# Altium PCB mchf_pro_ui.PcbDoc (part 1 of 7)
Units mil, origin at the board's own origin, x right, y up, seen from the top; angles counter-clockwise.
Board outline 7877.73 x 5661.04 mil, 2 copper layers (Top Layer, Bottom Layer); 345 components, 345 nets, 1318 pads, 783 vias.
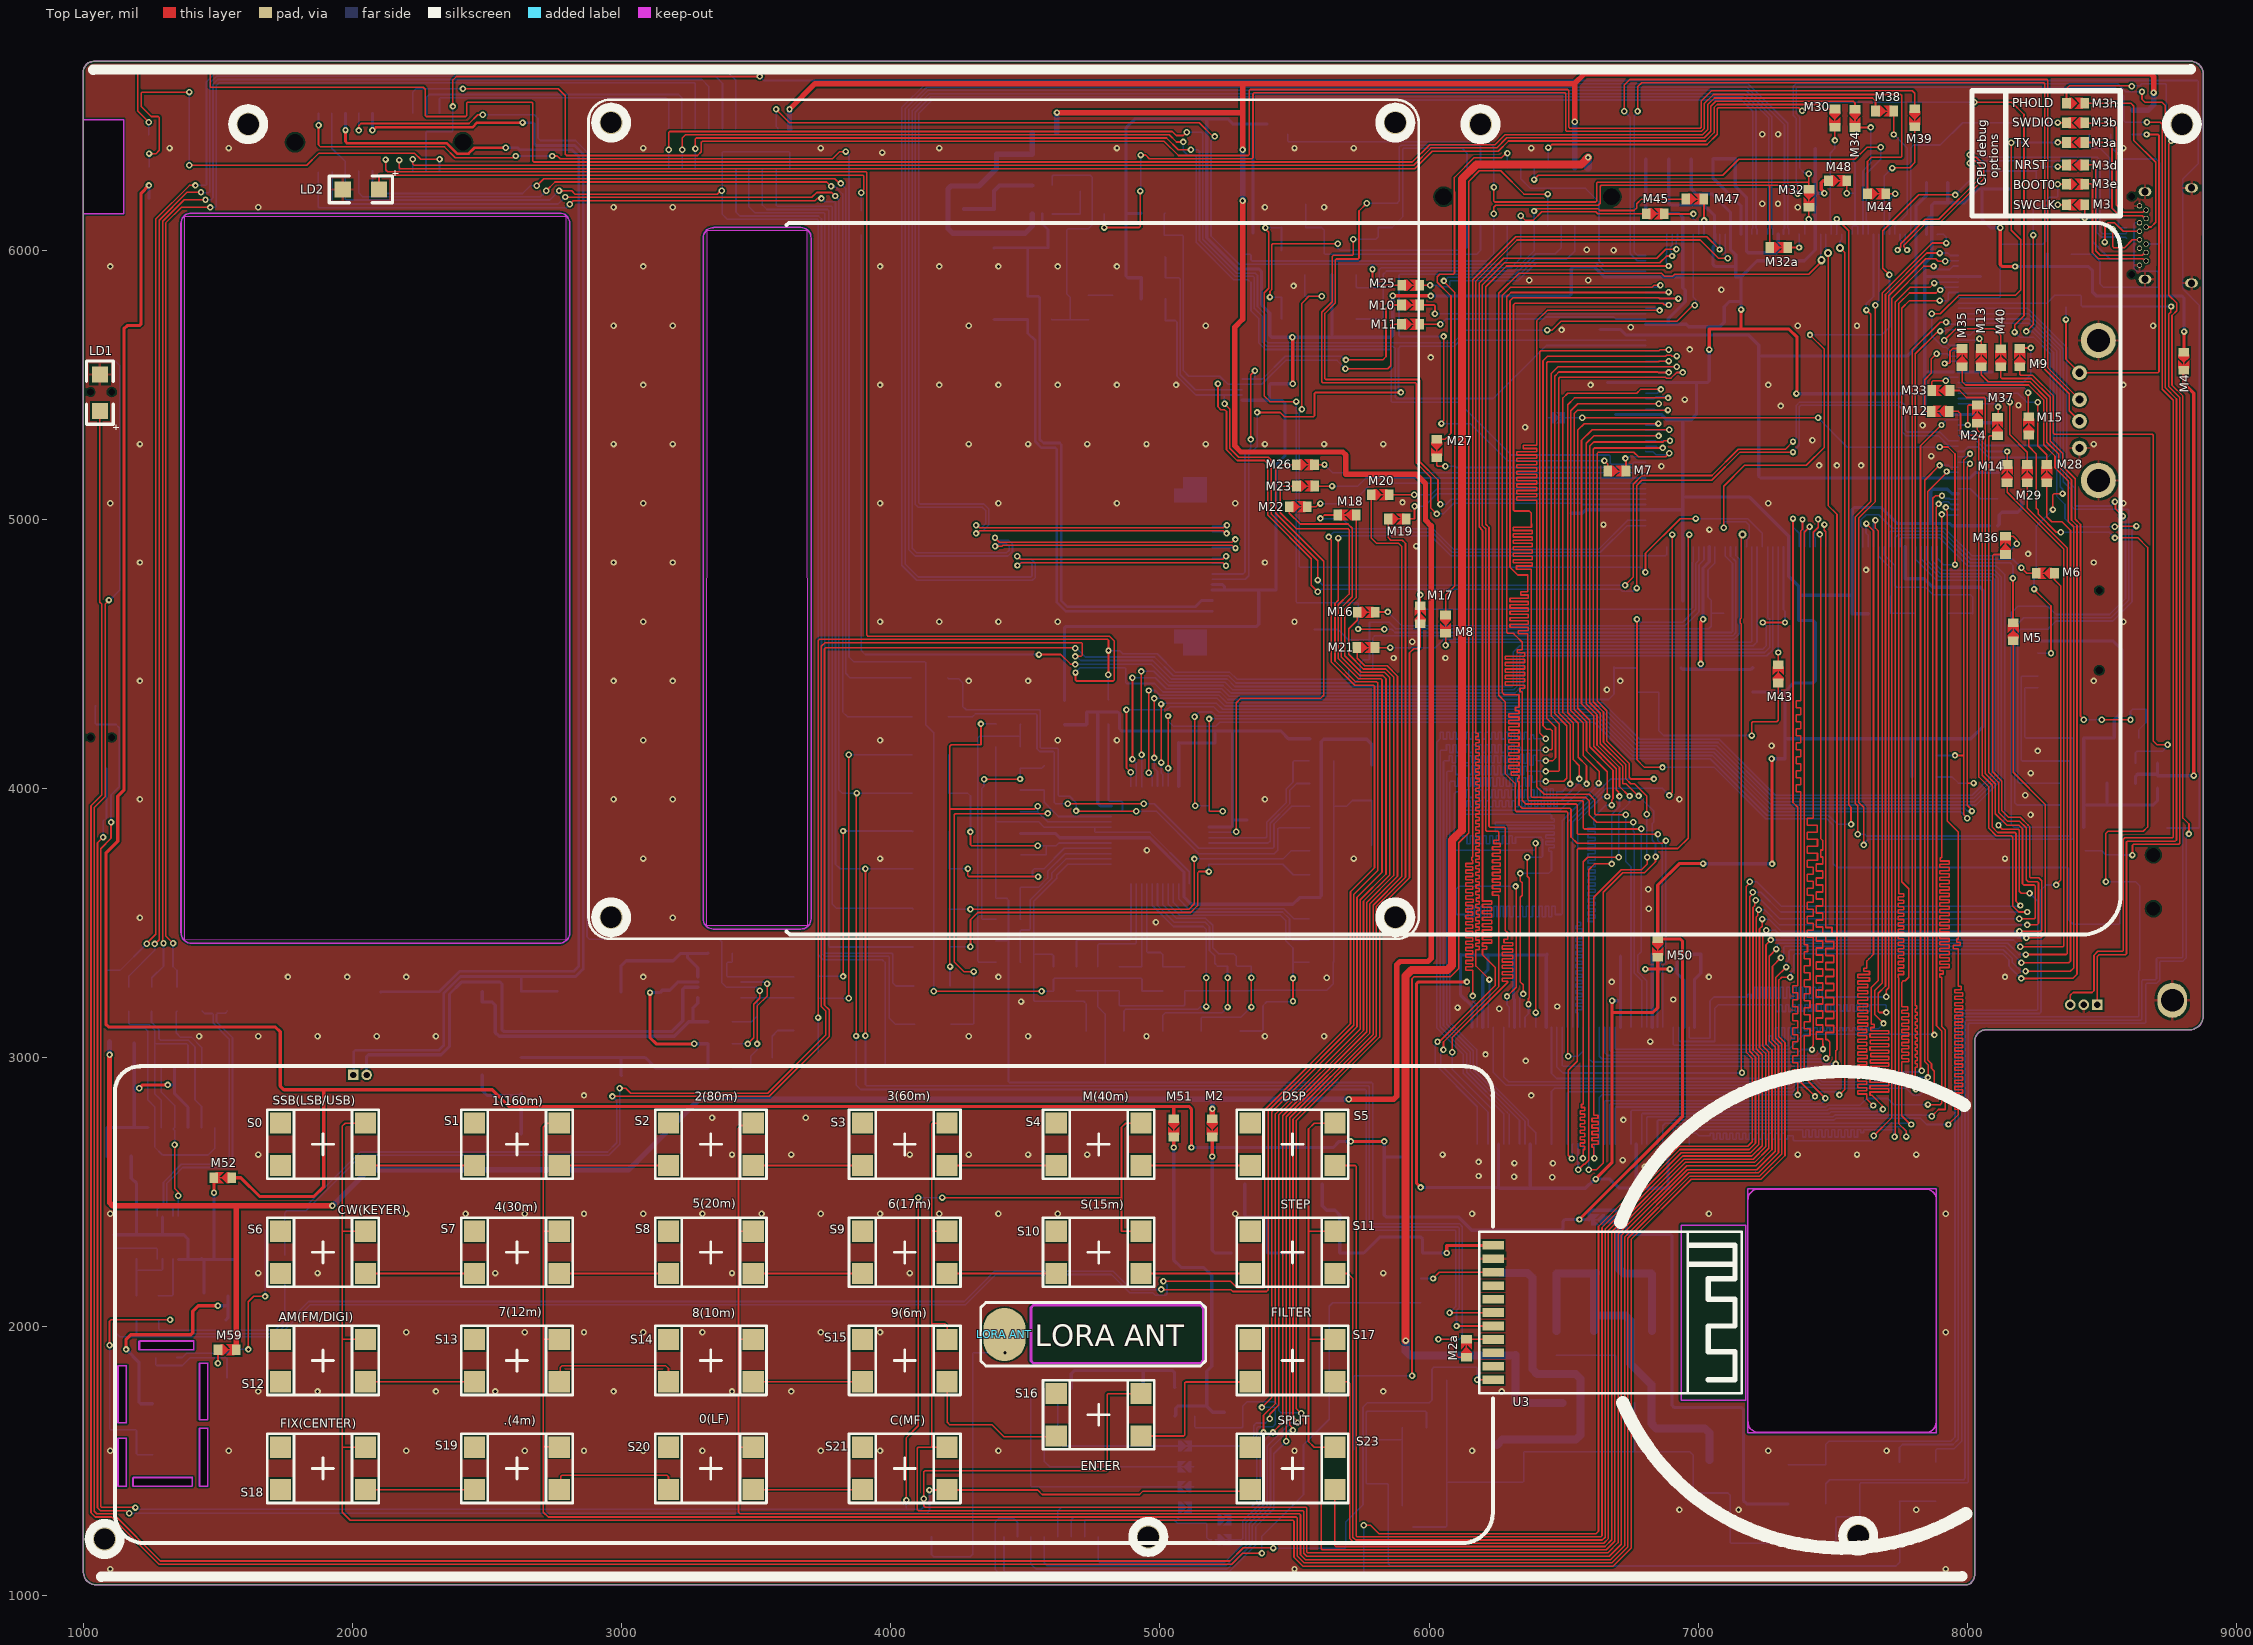
[diagram p0: Top Layer view]
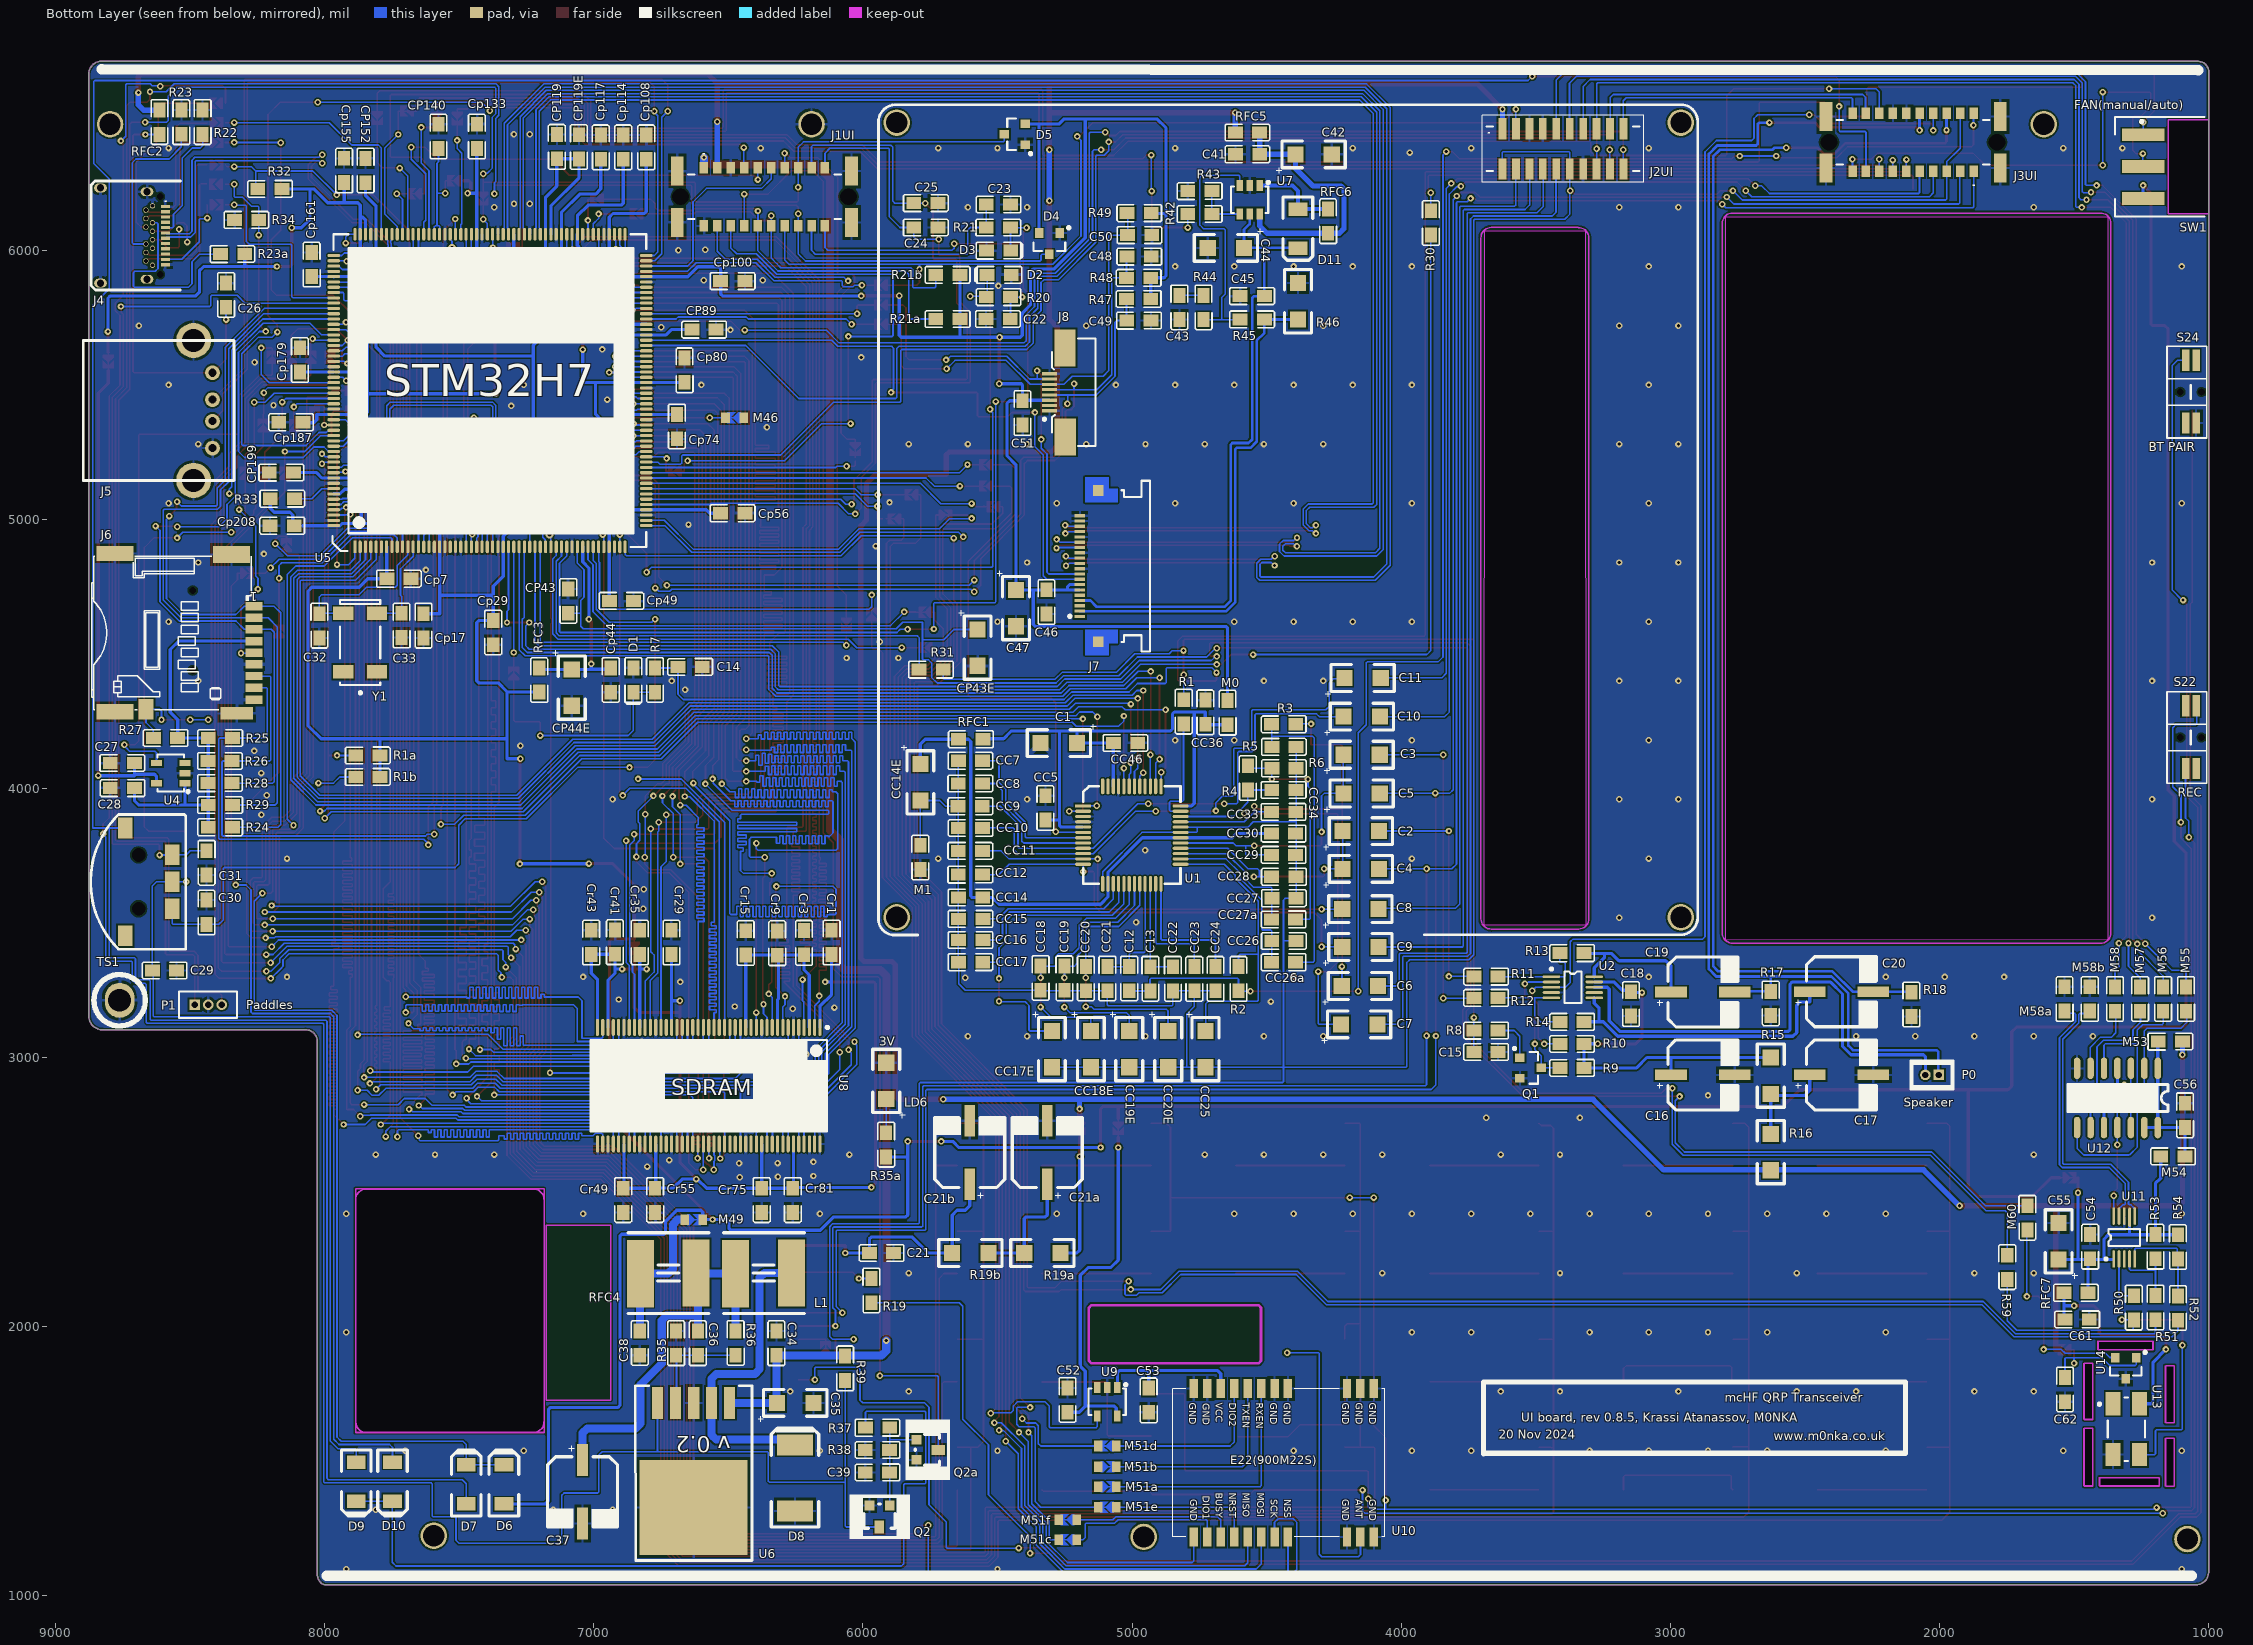
[diagram p1: Bottom Layer view, seen from below]

## Layer stack, top to bottom
Top Solder: solder mask 0.4, Solder Resist, Dk 3.5
Top Layer: signal copper 1.4
Dielectric 1: dielectric 12.6, FR-4, Dk 4.8
Bottom Layer: signal copper 1.4
Bottom Solder: solder mask 0.4, Solder Resist, Dk 3.5

## Board outline
1047.73,1041.39 cw(c1047.54,1088.93) 1000,1088.93 999.58,5699.29 999.49,6661.89 999.49,6662.44 cw(c1038.71,6662.76) 1038.39,6701.98 8828.29,6701.98 8828.11,6702.43 cw(c8828.3,6653.51) 8877.22,6653.91 8877.01,6653.11 8876.34,3156.5 cw(c8824.85,3155.22) 8826.12,3103.72 8825.65,3103.46 8070.87,3103.46 ccw(c8070.02,3061.02) 8027.58,3061.87 8027.56,3061.87 8027.56,1076.79 8027.17,1076.79 cw(c7988.18,1078.6) 7999.97,1041.39 7999.98,1041.39
cut-out: 2794.41,3439.04 2794.41,6124.72 1375.63,6124.72 1374.02,3440.98
cut-out: 1129.44,1408.64 1161.54,1408.64 1161.54,1586.16 1129.44,1586.16
cut-out: 1129.44,1644.15 1161.54,1644.15 1161.54,1856.06 1129.44,1856.06
cut-out: 1463.83,1623.5 1431.73,1623.5 1431.73,1409.07 1463.83,1409.07
cut-out: 1463.83,1865.15 1431.73,1865.15 1431.73,1656.3 1463.83,1656.3
cut-out: 1185.44,1441.7 1185.44,1409.6 1406.44,1409.6 1406.44,1441.7
cut-out: 1208.44,1947.7 1208.44,1915.07 1412.29,1915.07 1412.29,1947.7
cut-out: 3689.65,6072.62 3316.76,6072.62 3314.72,3493.07 3691.98,3493.07
cut-out: 7884.17,2512.89 7183.95,2512.89 7183.95,1607.59 7884.17,1607.59

## Design rules (kind name [scope] priority, off if disabled: settings)
Clearance Clearance_2 [InComponent('U204')] p1: gap=5 ignorepadtopadclearanceinfootprint=FALSE except(0: Arc-Hole Track-Hole SMDPad-Hole THPad-Hole Via-Hole Fill-Hole Poly-Hole Region-Hole Text-Hole)
Clearance [All] p2: gap=6 ignorepadtopadclearanceinfootprint=FALSE except(0: Arc-Hole Track-Hole SMDPad-Hole THPad-Hole Via-Hole Fill-Hole Poly-Hole Region-Hole Text-Hole)
DiffPairsRouting [All] p1: maxlimit=24 minlimit=6 mostfreqgap=6 toplayer_minwidth=6 toplayer_maxwidth=6 toplayer_prefwidth=6 bottomlayer_minwidth=6 bottomlayer_maxwidth=6 bottomlayer_prefwidth=6 maxuncoupledlength=500
HoleSize [All] p1: absolutevalues=TRUE maxlimit=6000 minlimit=11.81 maxpercent=80.000 minpercent=20.000
MatchedLengths "Schematic Matched Net Lengths_8" [InNet('IMD3_TEST_N')] p1: tolerance=300 checknetsindiffpair=TRUE checkdiffpairvsdiffpair=FALSE checkxsignals=FALSE checkothers=FALSE
MatchedLengths "Schematic Matched Net Lengths_7" [InNet('IMD3_TEST_P')] p2: tolerance=300 checknetsindiffpair=TRUE checkdiffpairvsdiffpair=FALSE checkxsignals=FALSE checkothers=FALSE
MatchedLengths "Schematic Matched Net Lengths_4" [InNet('OTG_HS_DP')] p3: tolerance=300 checknetsindiffpair=TRUE checkdiffpairvsdiffpair=FALSE checkxsignals=FALSE checkothers=FALSE
MatchedLengths "Schematic Matched Net Lengths" [InNet('OTG_HS_DM')] p4: tolerance=300 checknetsindiffpair=TRUE checkdiffpairvsdiffpair=FALSE checkxsignals=FALSE checkothers=FALSE
MatchedLengths "Schematic Matched Net Lengths_12" [InNetClass('FMC_D[0..31]')] p5: tolerance=100 checknetsindiffpair=FALSE checkdiffpairvsdiffpair=TRUE checkxsignals=TRUE checkothers=TRUE
MatchedLengths "Schematic Matched Net Lengths_3" [InNetClass('FMC_A[0..11]')] p6: tolerance=100 checknetsindiffpair=FALSE checkdiffpairvsdiffpair=TRUE checkxsignals=TRUE checkothers=TRUE
MatchedLengths "Schematic Matched Net Lengths_2" [InNet('USB_DFU_N')] p7: tolerance=300 checknetsindiffpair=TRUE checkdiffpairvsdiffpair=FALSE checkxsignals=FALSE checkothers=FALSE
MatchedLengths "Schematic Matched Net Lengths_1" [InNet('USB_DFU_P')] p8: tolerance=300 checknetsindiffpair=TRUE checkdiffpairvsdiffpair=FALSE checkxsignals=FALSE checkothers=FALSE
PolygonConnect PolygonConnect_4 [InComponent('C1') or InComponent('C2') or InComponent('C5')  or InComponent('C6')] p1: connectstyle=Relief reliefconductorwidth=20 reliefentries=4 polygonreliefangle="45 Angle" airgapwidth=10
PolygonConnect PolygonConnect_1 [IsVia] p2: connectstyle=Direct reliefconductorwidth=10 reliefentries=4 polygonreliefangle="90 Angle" airgapwidth=10
PolygonConnect [All] p3: connectstyle=Relief reliefconductorwidth=10 reliefentries=4 polygonreliefangle="90 Angle" airgapwidth=10
RoomDefinition "BT Audio Module" [InComponentClass('BT Audio Module')] p1: confinementstyle=ConfineOut formatcopy=TRUE lockcomponents=FALSE outline 8326.72,6832.68 8840.55,6832.68 8840.55,7471.46 8326.72,7471.46
RoomDefinition "Speaker Amp" [InComponentClass('Speaker Amp')] p2: confinementstyle=ConfineOut formatcopy=TRUE lockcomponents=FALSE outline 7312.99,7855.31 8839.57,7855.31 8839.57,8160.43 7312.99,8160.43
RoomDefinition Codec [InComponentClass('Codec')] p3: confinementstyle=ConfineIn formatcopy=TRUE lockcomponents=FALSE outline 5853.41,2409.89 5853.41,4169.48 3920.4,4169.48 3920.4,2409.89
RoomDefinition "Debug Port" [InComponentClass('Debug Port')] p4: confinementstyle=ConfineIn formatcopy=TRUE lockcomponents=FALSE outline 8876.88,6643.7 8091.98,6643.7 8091.98,4617.07 8876.88,4617.07
RoomDefinition "LORA wireless module" [InComponentClass('LORA wireless module')] p5: confinementstyle=ConfineOut formatcopy=TRUE lockcomponents=FALSE outline 6156.5,7856.3 7292.32,7856.3 7292.32,8159.45 6156.5,8159.45
RoomDefinition "LCD interface" [InComponentClass('LCD interface')] p6: confinementstyle=ConfineIn formatcopy=TRUE lockcomponents=FALSE outline 3923.23,4184.06 5771.65,4184.06 5771.65,6621.28 3923.23,6621.28
RoomDefinition "Local Oscillator" [InComponentClass('Local Oscillator')] p7: confinementstyle=ConfineIn formatcopy=TRUE lockcomponents=FALSE outline 1985.24,3409.45 1050.35,3409.45 1050.35,1352.36 1985.24,1352.36
RoomDefinition SDRAM [InComponentClass('SDRAM')] p8: confinementstyle=ConfineIn formatcopy=TRUE lockcomponents=FALSE outline 5883.86,3655.12 5883.86,2360.24 7162.35,2360.24 7162.35,3655.12
RoomDefinition CPU [InComponentClass('CPU')] p9: confinementstyle=ConfineOut formatcopy=TRUE lockcomponents=FALSE outline 6151,6828 6517,6828 6517,7836 6151,7836
RoomDefinition "RF/Audio board Interface" [InComponentClass('RF/Audio board Interface')] p10: confinementstyle=ConfineOut formatcopy=TRUE lockcomponents=FALSE outline 7588.52,6833.66 8315.68,6833.66 8315.68,7471.46 7588.52,7471.46
RoomDefinition "UI Controls" [InComponentClass('UI Controls')] p11: confinementstyle=ConfineOut formatcopy=TRUE lockcomponents=FALSE outline 6536,6828 7580,6828 7580,7477 6536,7477
RoomDefinition "CPU power and clocks" [InComponentClass('CPU power and clocks')] p12: confinementstyle=ConfineOut formatcopy=TRUE lockcomponents=FALSE outline 6536,7495 8840,7495 8840,7832 6536,7832
RoutingVias [All] p1: holewidth=15 width=30 viastyle="Through Hole" minholewidth=28 minwidth=50 maxholewidth=28 maxwidth=50
SilkToSilkClearance [All] p1: silktosilkclearance=5
SilkToSolderMaskClearance SilkscreenOverComponentPads [IsPad] p1: minsilkscreentomaskgap=0 clearancetoexposedcopper=TRUE
SolderMaskExpansion SolderMaskExpansion_1 [IsVia] p1: expansion=-15 istentingtop=FALSE
SolderMaskExpansion [All] p2: expansion=4 istentingtop=FALSE
Width "Schematic Width Constraint_33" [InNet('NetC21a_1')] p1: maxlimit=12 minlimit=12 preferedwidth=12
Width "Schematic Width Constraint_32" [InNet('NetM2_2')] p2: maxlimit=12 minlimit=12 preferedwidth=12
Width "Schematic Width Constraint_31" [InNet('NetC36_2')] p3: maxlimit=30 minlimit=30 preferedwidth=30
Width "Schematic Width Constraint_30" [InNet('NetD8_2')] p4: maxlimit=30 minlimit=30 preferedwidth=30
Width "Schematic Width Constraint_29" [InNet('VCC_20V')] p5: maxlimit=30 minlimit=30 preferedwidth=30
Width "Schematic Width Constraint_28" [InNet('NetC38_1')] p6: maxlimit=30 minlimit=30 preferedwidth=30
Width "Schematic Width Constraint_27" [InNet('LCD_VDD')] p7: maxlimit=20 minlimit=20 preferedwidth=20
Width "Schematic Width Constraint_26" [InNet('VCC_5V_RF')] p8: maxlimit=20 minlimit=20 preferedwidth=20
Width "Schematic Width Constraint_25" [InNet('GND')] p9: maxlimit=20 minlimit=20 preferedwidth=20
Width "Schematic Width Constraint_24" [InNet('NetD11_1')] p10: maxlimit=15 minlimit=15 preferedwidth=15
Width "Schematic Width Constraint_23" [InNet('SD_POWER')] p11: maxlimit=12 minlimit=12 preferedwidth=12
Width "Schematic Width Constraint_22" [InNet('UI_3V_SDRAM')] p12: maxlimit=12 minlimit=12 preferedwidth=12
Width "Schematic Width Constraint_21" [InNet('UI_3V_LO')] p13: maxlimit=12 minlimit=12 preferedwidth=12
Width "Schematic Width Constraint_20" [InNet('NetC56_2')] p14: maxlimit=12 minlimit=12 preferedwidth=12
Width "Schematic Width Constraint_19" [InNet('NetC21_2')] p15: maxlimit=12 minlimit=12 preferedwidth=12
Width "Schematic Width Constraint_18" [InNet('VDDA')] p16: maxlimit=12 minlimit=12 preferedwidth=12
Width "Schematic Width Constraint_17" [InNet('NetC20_1')] p17: maxlimit=12 minlimit=12 preferedwidth=12
Width "Schematic Width Constraint_16" [InNet('NetCP89_2')] p18: maxlimit=12 minlimit=12 preferedwidth=12
Width "Schematic Width Constraint_15" [InNet('UI_3V_MCU')] p19: maxlimit=12 minlimit=12 preferedwidth=12
Width "Schematic Width Constraint_14" [InNet('NetC1_1')] p20: maxlimit=12 minlimit=12 preferedwidth=12
Width "Schematic Width Constraint_13" [InNet('NetC53_2')] p21: maxlimit=12 minlimit=12 preferedwidth=12
Width "Schematic Width Constraint_12" [InNet('NetC61_2')] p22: maxlimit=12 minlimit=12 preferedwidth=12
Width "Schematic Width Constraint_11" [InNet('NetC19_1')] p23: maxlimit=12 minlimit=12 preferedwidth=12
Width "Schematic Width Constraint_10" [InNet('NetCP119_1')] p24: maxlimit=12 minlimit=12 preferedwidth=12
Width "Schematic Width Constraint_9" [InNet('NetCC14_2')] p25: maxlimit=12 minlimit=12 preferedwidth=12
Width "Schematic Width Constraint_8" [InNet('NetP0_2')] p26: maxlimit=12 minlimit=12 preferedwidth=12
Width "Schematic Width Constraint_7" [InNet('NetC27_2')] p27: maxlimit=12 minlimit=12 preferedwidth=12
Width "Schematic Width Constraint_6" [InNet('NetC52_2')] p28: maxlimit=12 minlimit=12 preferedwidth=12
Width "Schematic Width Constraint_5" [InNet('NetC16_1')] p29: maxlimit=12 minlimit=12 preferedwidth=12
Width "Schematic Width Constraint_4" [InNet('NetC17_1')] p30: maxlimit=12 minlimit=12 preferedwidth=12
Width "Schematic Width Constraint_3" [InNet('LCD_BL_A')] p31: maxlimit=10 minlimit=10 preferedwidth=10
Width "Schematic Width Constraint_2" [InNet('PHONES_R')] p32: maxlimit=10 minlimit=10 preferedwidth=10
Width "Schematic Width Constraint_1" [InNet('LCD_BL_K')] p33: maxlimit=10 minlimit=10 preferedwidth=10
Width "Schematic Width Constraint" [InNet('PHONES_L')] p34: maxlimit=10 minlimit=10 preferedwidth=10
Width [All] p35: maxlimit=6 minlimit=6 preferedwidth=6
26 further rules are at their usual default settings.

## Classes and differential pairs
component class "BT Audio Module": C21 C21a C21b LD1 M2 M2a R19 R19a R19b U3
component class "Speaker Amp": C14 C15 C16 C17 C18 C19 C20 D1 J3UI P0 Q1 R7 R8 R9 R10 R11 R12 R13 R14 R15 R16 R17 R18 SW1 U2
component class "LORA wireless module": C52 C53 "Lora Ant" M51 M51a M51b M51c M51d M51e M51f U9 U10
component class "Debug Port": C26 C27 C28 J4 J5 J6 M3 M3a M3b M3d M3e M3h M4 R22 R23 R23a R24 R25 R26 R27 R28 R29 RFC2 U4
component class Codec: C1 C2 C3 C4 C5 C6 C7 C8 C9 C10 C11 C12 C13 CC5 CC7 CC8 CC9 CC10 CC11 CC12 CC14 CC14E CC15 CC16 CC17 CC17E CC18 CC18E CC19 CC19E CC20 CC20E CC21 CC22 CC23 CC24 CC25 CC26 CC26a CC27 CC27a CC28 CC29 CC30 CC33 CC34 CC36 CC46 M0 M1 R1 R1a R1b R2 R3 R4 R5 R6 RFC1 U1
component class "Local Oscillator": C54 C55 C56 C61 C62 J2UI M52 M53 M54 M55 M56 M57 M58 M58a M58b M59 M60 R50 R51 R52 R53 R54 R59 RFC7 U11 U12 U13 U14
component class "CPU Power and Clocks": C32 C33 C34 C35 C36 C37 C38 C39 Cp7 Cp17 Cp29 CP43 CP43E Cp44 CP44E Cp49 Cp56 Cp74 Cp80 CP89 Cp100 Cp108 Cp114 Cp117 CP119 CP119E Cp133 CP140 CP152 Cp155 Cp161 Cp179 Cp187 CP199 Cp208 D6 D7 D8 D9 D10 L1 LD6 M48 M49 Q2 Q2a R32 R33 R34 R35 R35a R36 R37 R38 R39 RFC3 RFC4 U6 Y1
net class FMC_D[0..31]: FMC_D0 FMC_D1 FMC_D2 FMC_D3 FMC_D4 FMC_D5 FMC_D6 FMC_D7 FMC_D8 FMC_D9 FMC_D10 FMC_D11 FMC_D12 FMC_D13 FMC_D14 FMC_D15 FMC_D16 FMC_D17 FMC_D18 FMC_D19 FMC_D20 FMC_D21 FMC_D22 FMC_D23 FMC_D24 FMC_D25 FMC_D26 FMC_D27 FMC_D28 FMC_D29 FMC_D30 FMC_D31
net class FMC_A[0..11]: FMC_A0 FMC_A1 FMC_A2 FMC_A3 FMC_A4 FMC_A5 FMC_A6 FMC_A7 FMC_A8 FMC_A9 FMC_A10 FMC_A11
component class SDRAM: Cr1 Cr3 Cr9 Cr15 Cr29 Cr35 Cr41 Cr43 Cr49 Cr55 Cr75 Cr81 M50 U8
component class "RF/Audio board Interface": C22 C23 C24 C25 D2 D3 D4 D5 J1UI P1 R20 R21 R21a R21b
component class "UI Controls": C29 C30 C31 C252 C255 C258 C267 C268 C269 C270 C271 C272 LD2 R30 S0 S1 S2 S3 S4 S5 S6 S7 S8 S9 S10 S11 S12 S13 S14 S15 S16 S17 S18 S19 S20 S21 S22 S23 S24 TS1
component class CPU: M5 M6 M7 M8 M9 M10 M11 M12 M13 M14 M15 M16 M17 M18 M19 M20 M21 M22 M23 M24 M25 M26 M27 M28 M29 M30 M32 M32a M33 M34 M35 M36 M37 M38 M39 M40 M43 M44 M45 M46 M47 R31 R_15 U5
component class "LCD interface": C41 C42 C43 C44 C45 C46 C47 C48 C49 C50 C51 D11 J7 J8 L4 L5 R42 R43 R44 R45 R46 R47 R48 R49 RFC5 RFC6 U7
differential pair IMD3_TEST: +IMD3_TEST_P -IMD3_TEST_N
differential pair DSI_D1: +DSI_D1_P -DSI_D1_N
differential pair DSI_D0: +DSI_D0_P -DSI_D0_N
differential pair DSI_CLK: +DSI_CLK_P -DSI_CLK_N
differential pair USB_DFU: +USB_DFU_P -USB_DFU_N

## Components (designator, comment, footprint, x,y, rotation, side; value= is the part's Value field where it differs from the comment)
C1 "10uF" 1206_Elec_Cap 5203.95,4169.14 r0 bottom
C2 "1uF" 1206_Elec_Cap 4218.45,3841.72 r180 bottom
C3 "1uF" 1206_Elec_Cap 4215.49,4125.72 r180 bottom
C4 "1uF" 1206_Elec_Cap 4218.45,3701.6 r180 bottom
C5 "1uF" 1206_Elec_Cap 4215.49,3981.82 r180 bottom
C6 "1uF" 1206_Elec_Cap 4221.59,3266.26 r180 bottom
C7 "1uF" 1206_Elec_Cap 4224.54,3123.54 r180 bottom
C8 "1uF" 1206_Elec_Cap 4219.67,3551.69 r180 bottom
C9 "1uF" 1206_Elec_Cap 4219.67,3411.29 r180 bottom
C10 "1uF" 1206_Elec_Cap 4214.7,4267.24 r180 bottom
C11 "1uF" 1206_Elec_Cap 4211.74,4410.95 r180 bottom
C12 "2.2uF" 0805 5010.83,3339.54 r270 bottom value=100nF
C13 "2.2uF" 0805 4932.09,3338.63 r270 bottom value=100nF
C14 "100nF" 0805 6596.28,4452.4 r0 bottom
C15 "100nF" 0805 3638.91,3021.39 r0 bottom
C16 "220uF" CAP_ALUM_Pro 2879.08,2936.03 r180 bottom locked
C17 "220uF" CAP_ALUM_Pro 2364.17,2936.03 r180 bottom locked
C18 "100nF" 0805 3145.67,3154.53 r90 bottom
C19 "100uF" CAP_ALUM_Pro 2878.94,3244.09 r180 bottom locked
C20 "100uF" CAP_ALUM_Pro 2364.17,3245.38 r180 bottom locked
C21 "100nF" 0805 5885.01,2274.58 r0 bottom
C21a "220uF" CAP_ALUM_Pro 5315.28,2647.64 r90 bottom locked
C21b "220uF" CAP_ALUM_Pro 5603.35,2647.64 r90 bottom locked
C22 "100nF" 0805 5543.48,5744.44 r180 bottom
C23 "100nF" 0805 5450.92,6170.5 r0 bottom
C24 "100nF" 0805 5811.88,6084.42 r180 bottom
C25 "100nF" 0805 5811.88,6174.97 r180 bottom
C26 "100nF" 0805 8366.45,5878.94 r270 bottom
C27 "2.2uF" 0805 8797.36,4094.74 r180 bottom value=1礔
C28 "100nF" 0805 8705.64,4001.97 r0 bottom
C29 "100nF" 0805 8549.23,3324.5 r0 bottom
C30 "100nF" 0805 8438.75,3494.62 r90 bottom
C31 "100nF" 0805 8438.75,3769.78 r270 bottom
C32 "1.5pF" 0805 8019.76,4650.76 r270 bottom
C33 "1.5pF" 0805 7713.89,4560.27 r90 bottom
C34 "100nF" 0805 6321.27,1893.92 r90 bottom
C35 "22uF" 1206_Elec_Cap 6319.83,1717.3 r180 bottom
C36 "DNI" 0805 6613.25,1893.92 r90 bottom
C37 "220uF" CAP_ALUM_Pro 7041.84,1387.31 r270 bottom locked
C38 "100nF" 0805 6829.31,1985.16 r270 bottom
C39 "100nF" 0805 5900.47,1459.35 r0 bottom
C41 "100nF" 0805 4616.45,6356.51 r180 bottom
C42 "10uF" 1206_Elec_Cap 4393.7,6356.43 r180 bottom
C43 "2.2uF" 0805 4824.47,5833.47 r270 bottom
C44 "1uF" 1206_Elec_Cap 4582.88,6009.21 r0 bottom
C45 "100nF" 0805 4599.3,5829.44 r180 bottom
C46 "100nF" 0805 5317.69,4647.77 r90 bottom value=100pF
C47 "10uF" 1206_Elec_Cap 5431.62,4739.05 r270 bottom
C48 "18pF" 0805 4927.84,5976.92 r0 bottom
C49 "18pF" 0805 4929.24,5739.22 r0 bottom
C50 "18pF" 0805 5017.59,6056.13 r180 bottom
C51 "100nF" 0805 5406.97,5350.35 r90 bottom value=100pF
C52 "2.2uF" 0805 5240.38,1773.3 r270 bottom value=1礔
C53 "100nF" 0805 4937.89,1681.59 r90 bottom
C54 "100nF" 0805 1439.86,2252.17 r90 bottom
C55 "10uF" 1206_Elec_Cap 1556.86,2249.46 r90 bottom
C56 "100nF" 0805 1087.72,2831.46 r270 bottom
C61 "100nF" 0805 1442.88,2027.94 r0 bottom
C62 "100nF" 0805 1533.96,1812.23 r270 bottom
CC5 "100nF" 0805 5321.95,3882.68 r90 bottom
CC7 "1nF" 0805 5646.02,4103.2 r180 bottom
CC8 "1nF" 0805 5646.43,4018.68 r180 bottom
CC9 "1nF" 0805 5555.47,3934.75 r0 bottom
CC10 "1nF" 0805 5555.06,3854 r0 bottom
CC11 "1nF" 0805 5646.43,3768.16 r180 bottom
CC12 "1nF" 0805 5646.43,3680.08 r180 bottom
CC14 "100nF" 0805 5646,3594.81 r180 bottom
CC14E "10uF" 1206_Elec_Cap 5786.92,4091.66 r270 bottom
CC15 "2.2uF" 0805 5645.28,3515.46 r180 bottom value=100nF
CC16 "2.2uF" 0805 5645.28,3437.08 r180 bottom value=100nF
CC17 "100nF" 0805 5645.57,3354.61 r180 bottom
CC17E "10uF" 1206_Elec_Cap 5298.22,3100.16 r270 bottom
CC18 "100nF" 0805 5340.03,3341.41 r270 bottom
CC18E "10uF" 1206_Elec_Cap 5153.18,3100.16 r270 bottom
CC19 "100nF" 0805 5250.99,3249.59 r90 bottom
CC19E "47uF" 1206_Elec_Cap 5010.83,3100.16 r270 bottom
CC20 "100nF" 0805 5172.05,3339.54 r270 bottom
CC20E "47uF" 1206_Elec_Cap 4865.65,3100.16 r270 bottom
CC21 "1nF" 0805 5092.19,3339.54 r270 bottom
CC22 "1nF" 0805 4848.49,3338.63 r270 bottom
CC23 "1nF" 0805 4768.38,3247.82 r90 bottom
CC24 "1nF" 0805 4689.8,3247.77 r90 bottom
CC25 "47uF" 1206_Elec_Cap 4727.04,3100.16 r270 bottom
CC26 "1nF" 0805 4481.49,3433.2 r180 bottom
CC26a "1nF" 0805 4391.33,3354.8 r0 bottom
CC27 "1nF" 0805 4481.33,3592.24 r180 bottom
CC27a "1nF" 0805 4391.33,3514.1 r0 bottom
CC28 "1nF" 0805 4390.53,3672.64 r0 bottom
CC29 "1nF" 0805 4391.33,3753.98 r0 bottom
CC30 "100nF" 0805 4391.33,3832.84 r0 bottom
CC33 "1nF" 0805 4482.29,3912.97 r180 bottom
CC34 "1nF" 0805 4482.19,3994.53 r180 bottom
CC36 "100nF" 0805 4727.46,4238.05 r90 bottom
CC46 "100nF" 0805 5069.67,4168.92 r180 bottom
Cp7 "100nF" 0805 7769.65,4779.42 r180 bottom (schematic designator CP7)
Cp17 "100nF" 0805 7633,4650.76 r270 bottom (schematic designator CP17)
Cp29 "100nF" 0805 7373.92,4624.95 r270 bottom (schematic designator CP29)
CP43 "100nF" 0805 7095.05,4742.5 r270 bottom value=10nF
CP43E "1uF" 1206_Elec_Cap 5573.91,4592.05 r270 bottom value=10uF
Cp44 "100nF" 0805 6937.23,4448.69 r270 bottom (schematic designator CP44)
CP44E "1uF" 1206_Elec_Cap 7082.07,4443.48 r270 bottom
Cp49 "100nF" 0805 6942.83,4697.09 r180 bottom (schematic designator CP49)
Cp56 "100nF" 0805 6529.52,5022.78 r180 bottom (schematic designator CP56)
Cp74 "100nF" 0805 6691.63,5390.33 r270 bottom (schematic designator CP74)
Cp80 "100nF" 0805 6662.4,5508.73 r90 bottom (schematic designator CP80)
CP89 "2.2uF" 0805 6544.61,5705.51 r0 bottom value=100nF
Cp100 "100nF" 0805 6529.52,5885.07 r180 bottom (schematic designator CP100)
Cp108 "100nF" 0805 6804.86,6337.33 r90 bottom (schematic designator CP108)
Cp114 "100nF" 0805 6890.3,6337.33 r90 bottom (schematic designator CP114)
Cp117 "100nF" 0805 6973.61,6337.33 r90 bottom (schematic designator CP117)
CP119 "100nF" 0805 7137.06,6339.04 r90 bottom
CP119E "2.2uF" 0805 7055.18,6338.18 r90 bottom value=100nF
Cp133 "100nF" 0805 7434.23,6377.45 r90 bottom (schematic designator CP133)
CP140 "2.2uF" 0805 7576.86,6377.45 r90 bottom value=1礔
CP152 "2.2uF" 0805 7847.94,6341.81 r270 bottom value=100nF
Cp155 "100nF" 0805 7927.41,6250.85 r90 bottom (schematic designator CP155)
Cp161 "100nF" 0805 8047.88,5901.38 r90 bottom (schematic designator CP161)
Cp179 "100nF" 0805 8091.76,5546.96 r90 bottom (schematic designator CP179)
Cp187 "100nF" 0805 8079.85,5361.44 r0 bottom (schematic designator CP187)
CP199 "2.2uF" 0805 8206.51,5173.8 r180 bottom value=10nF
Cp208 "100nF" 0805 8112.16,4976.95 r0 bottom (schematic designator CP208)
Cr1 "100nF" 0805 6116.08,3383.07 r90 bottom (schematic designator CR1)
Cr3 "100nF" 0805 6218.75,3381.64 r90 bottom (schematic designator CR3)
Cr9 "100nF" 0805 6318.3,3379.93 r90 bottom (schematic designator CR9)
Cr15 "100nF" 0805 6435.28,3380.78 r90 bottom (schematic designator CR15)
Cr29 "100nF" 0805 6710.87,3383.07 r90 bottom (schematic designator CR29)
Cr35 "100nF" 0805 6828.97,3383.07 r90 bottom (schematic designator CR35)
Cr41 "100nF" 0805 6921.3,3383.93 r90 bottom (schematic designator CR41)
Cr43 "100nF" 0805 7009.3,3382.49 r90 bottom (schematic designator CR43)
Cr49 "100nF" 0805 6890.83,2516.09 r270 bottom (schematic designator CR49)
Cr55 "100nF" 0805 6772.12,2516.09 r270 bottom (schematic designator CR55)
Cr75 "100nF" 0805 6376.23,2516.09 r270 bottom (schematic designator CR75)
Cr81 "100nF" 0805 6260.84,2516.09 r270 bottom (schematic designator CR81)
D1 "4.7V" 0805P 6853.33,4448.69 r270 bottom
D2 "4.7V" 0805P 5447.83,5909.18 r0 bottom
D3 "4.7V" 0805P 5541.64,5998.79 r180 bottom
D4 "BAV99" SOT-23 5307.09,6024.96 r0 bottom
D5 "BAV99" SOT-23 5436.02,6431.1 r90 bottom
D6 "PMEG6010CEH" SOD87 7333.92,1341.6 r90 bottom
D7 "PMEG6010CEH" SOD87 7473.4,1341.6 r90 bottom
D8 "SS24" DO214 6252.37,1315.12 r90 bottom locked
D9 "PMEG6010CEH" SOD87 7882.72,1497.82 r270 bottom
D10 "PMEG6010CEH" SOD87 7748,1497.82 r270 bottom
D11 "PMEG6010CEH" SOD87 4383.94,6153.87 r270 bottom
J1UI "1373866" 1373866 6366.04,6199.06 r180 bottom locked
J2UI "1373866" YuanQi4mm 3398.82,6376.97 r180 bottom locked
J3UI "1373866" 1373866 2098.03,6401.57 r0 bottom locked
J4 "219320-0001" USBC_24P 8610.86,6054.92 r270 bottom locked
J5 "USB_OUT" USB_OUT_A 8897.64,5144.09 r180 bottom locked
J6 "PJS008-2003" PJS008-2003-1 8875.98,4578.74 r0 bottom locked
J7 "LCD-20pin FPC" MOLX-52746-2071 5157.48,4826.77 r90 bottom locked
J8 "FH19C-6S-05SH" MOLX-501461-0891 5275.59,5472.44 r90 bottom locked
L1 "47uH" CD75 6368.3,2199.8 r0 bottom locked
LD1 "LTST-C150GKT" 1206_Elec_Cap 1061.25,5402.69 r90 top locked
LD2 "LTST-C150GKT" 1206_Elec_Cap 2099.28,6226.6 r180 top locked
LD6 "3V" 1206_Elec_Cap 5913.39,2845.47 r90 bottom
"LORA ANT" "TP" LORA_ANT_PAD 4422.24,1972.44 r270 top
M0 "0" 0805 4644.71,4236.65 r90 bottom
M1 "0" 0805 5786.48,3698.3 r90 bottom
M2 "0" SB_0603 5194.67,2739.17 r90 top net-tie value=1K
M2a "0" SB_0603 6138.78,1920.28 r270 top net-tie value=1K
M3 "0" SB_0603_NO 8402.36,6169.58 r0 top net-tie value=1K
M3a "0" SB_0603_NO 8402.36,6400.77 r0 top net-tie value=1K
M3b "0" SB_0603_NO 8402.36,6474.41 r0 top net-tie value=1K
M3d "0" SB_0603_NO 8402.36,6317.26 r0 top net-tie value=1K
M3e "0" SB_0603_NO 8402.36,6245.27 r180 top net-tie value=1K
M3h "0" SB_0603_NO 8402.36,6546.25 r180 top net-tie value=1K
M4 "0" SB_0603 8803.95,5587.6 r90 top net-tie value=1K
M5 "0" SB_0603 8170.21,4582.96 r270 top net-tie value=1K
M6 "0" SB_0603 8290.3,4800.2 r0 top net-tie value=1K
M7 "0" SB_0603 6697.83,5179.66 r180 top net-tie value=1K
M8 "0" SB_0603 6061.38,4611.12 r90 top net-tie value=1K
M9 "0" SB_0603 8195.06,5601.35 r270 top net-tie value=1K
M10 "0" SB_0603 5931.28,5796.78 r180 top net-tie value=1K
M11 "0" SB_0603 5931.28,5724.98 r180 top net-tie value=1K
M12 "0" SB_0603 7899.21,5401.57 r0 top net-tie value=1K
M13 "0" SB_0603 8051.83,5601.35 r270 top net-tie value=1K
M14 "0" SB_0603 8147.86,5170.37 r270 top net-tie value=1K
M15 "0" SB_0603 8227.84,5347.35 r270 top net-tie value=1K
M16 "0" SB_0603 5766.73,4655.51 r180 top net-tie value=1K
M17 "0" SB_0603 5967.52,4645.51 r270 top net-tie value=1K
M18 "0" SB_0603 5695.12,5016.73 r0 top net-tie value=1K
M19 "0" SB_0603 5881.6,5001.97 r180 top net-tie value=1K
M20 "0" SB_0603 5818.85,5091.87 r180 top net-tie value=1K
M21 "0" SB_0603 5765.43,4523.78 r180 top net-tie value=1K
M22 "0" SB_0603 5513.51,5047.24 r180 top net-tie value=1K
M23 "0" SB_0603 5541.01,5124.02 r180 top net-tie value=1K
M24 "0" SB_0603 8037.52,5391.57 r270 top net-tie value=1K
M25 "0" SB_0603 5932.31,5869.78 r180 top net-tie value=1K
M26 "0" SB_0603 5540.64,5203.66 r180 top net-tie value=1K
M27 "0" SB_0603 6028.52,5263.51 r90 top net-tie value=1K
M28 "0" SB_0603 8294.86,5170.37 r270 top net-tie value=1K
M29 "0" SB_0603 8222.85,5170.37 r270 top net-tie value=1K
M30 "0" SB_0603 7507.81,6491.5 r90 top net-tie value=1K
M32 "0" SB_0603 7411.42,6193.2 r90 top net-tie value=1K
M32a "0" SB_0603 7299.16,6010.36 r180 top net-tie value=1K
M33 "0" SB_0603 7901.83,5479.05 r0 top net-tie value=1K
M34 "0" SB_0603 7582.68,6490.16 r90 top net-tie value=1K
M35 "0" SB_0603 7980.54,5601.35 r270 top net-tie value=1K
M36 "0" SB_0603 8141.61,4903.54 r270 top net-tie value=1K
M37 "0" SB_0603 8112.16,5345.34 r270 top net-tie value=1K
M38 "0" SB_0603 7692.58,6517.36 r180 top net-tie value=1K
M39 "0" SB_0603 7804.93,6492.25 r90 top net-tie value=1K
M40 "0" SB_0603 8123.86,5600.74 r270 top net-tie value=1K
M43 "0" SB_0603 7297.21,4426.15 r270 top net-tie value=1K
M44 "0" SB_0603 7662.9,6210.41 r180 top net-tie value=1K
M45 "0" SB_0603 6840.71,6135.85 r180 top net-tie value=1K
M46 "0" SB_0603 6477.01,5377.78 r180 bottom net-tie value=1K
M47 "0" SB_0603 6987.55,6190.41 r180 top net-tie value=1K
M48 "0" SB_0603 7517.81,6258.47 r180 top net-tie value=1K
M49 "0" SB_0603 6628.94,2398.33 r0 bottom net-tie value=1K
M50 "0" SB_0603 6849.39,3407.61 r90 top net-tie value=1K
M51 "0" SB_0603 5051.18,2739.17 r90 top net-tie value=1K
M51a "0" SB_0603 5092.52,1405.61 r0 bottom net-tie value=1K
M51b "0" SB_0603 5092.52,1479.83 r0 bottom net-tie value=1K
M51c "0" SB_0603 5238.66,1208.71 r180 bottom net-tie value=1K
M51d "0" SB_0603 5092.52,1557.09 r180 bottom net-tie value=1K
M51e "0" SB_0603 5092.52,1329.96 r180 bottom net-tie value=1K
M51f "0" SB_0603 5238.66,1282.82 r180 bottom net-tie value=1K
M52 "0" SB_0603 1518.17,2554.01 r0 top net-tie value=1K
M53 "0" 0805 1187.9,3059.57 r180 bottom
M54 "DNI" 0805 1086.86,2633.78 r0 bottom
M55 "0" 0805 1083.99,3263.53 r270 bottom
M56 "0" 0805 1169.34,3263.53 r270 bottom
M57 "0" 0805 1254.69,3263.53 r270 bottom
M58 "0" 0805 1348.03,3263.53 r270 bottom
M58a "DNP" 0805 1534.87,3172.57 r90 bottom
M58b "DNP" 0805 1441.35,3172.57 r90 bottom
M59 "0" SB_0603 1533.73,1915.07 r180 top net-tie value=1K
M60 "0" 0805 1673.45,2450.66 r270 bottom
P0 "Speaker" MHDR1X2_m 2002.16,2936.03 r0 bottom locked
P1 "MHDR1X3" MHDR1X3 8482.7,3196.78 r180 bottom locked
Q1 "IRLML6244TRPBF" SOT-23 3519.68,2962.15 r270 bottom
Q2 "IRLML6244TRPBF" SOT-23-Pro 5900.47,1336.71 r0 bottom
Q2a "IRLML6244TRPBF" SOT-23-Pro 5801.01,1581.06 r270 bottom
R1 "1k" 0805 4808.16,4331.16 r270 bottom
R1a "4.7K" 0805 7885.33,4122.9 r180 bottom
R1b "4.7K" 0805 7885.33,4042.95 r180 bottom
R2 "1k" 0805 4604.38,3247.82 r90 bottom
R3 "0" 0805 4391.01,4239.12 r0 bottom
R4 "0" 0805 4569.67,3994.3 r90 bottom
R5 "DNI" 0805 4481.33,4154.9 r180 bottom
R6 "DNI" 0805 4481.33,4075.23 r180 bottom
R7 "1k" 0805 6773.1,4448.69 r270 bottom
R8 "22K" 0805 3638.91,3101.13 r0 bottom
R9 "100k" 0805 3319.58,2962.38 r0 bottom
R10 "100k" 0805 3319.58,3051.4 r0 bottom
R11 "22K" 0805 3638.91,3301.4 r0 bottom
R12 "22K" 0805 3638.91,3222.66 r0 bottom
R13 "22K" 0805 3319.58,3388.69 r0 bottom
R14 "22K" 0805 3319.58,3133.44 r0 bottom
R15 "2.2/1206" 1206 2626.75,2864.88 r90 bottom
R16 "2.2/1206" 1206 2626.75,2580.89 r90 bottom
R17 "1k" 0805 2627.19,3247.35 r270 bottom
R18 "1k" 0805 2104.11,3152.69 r90 bottom
R19 "330" 0805 5968.8,2180.57 r270 bottom
R19a "2.2/1206" 1206 5264.68,2274.58 r0 bottom
R19b "2.2/1206" 1206 5532.61,2274.58 r0 bottom
R20 "1k" 0805 5450.92,5826.41 r0 bottom
R21 "1k" 0805 5542.63,6084.42 r180 bottom
R21a "4.7K" 0805 5730.48,5744.44 r180 bottom
R21b "4.7K" 0805 5730.48,5908.59 r180 bottom
R22 "5.1k" 0805 8453.8,6521.66 r270 bottom
R23 "5.1k" 0805 8532.2,6430.7 r90 bottom
R23a "2.2k" 0805 8387.82,5985.8 r180 bottom
R24 "10k" 0805 8433.56,3856.08 r180 bottom
R25 "10k" 0805 8433.56,4187.77 r180 bottom
R26 "10k" 0805 8434.85,4102.14 r180 bottom
R27 "10k" 0805 8545.4,4188.21 r0 bottom
R28 "10k" 0805 8434.89,4020.21 r180 bottom
R29 "10k" 0805 8433.56,3938.68 r180 bottom
R30 "1k" 0805 3889.54,6056.1 r90 bottom
R31 "100" 0805 5792.19,4441.71 r180 bottom
R32 "10k" 0805 8157.55,6228.39 r0 bottom
R33 "10k" 0805 8203.02,5076.78 r180 bottom
R34 "10k" 0805 8336.03,6112.97 r180 bottom
R35 "1k" 0805 6693.77,1893.92 r90 bottom
R35a "1k" 0805 5913.83,2722.18 r270 bottom
R36 "1.6k" 0805 6473.05,1985.63 r270 bottom
R37 "0" 0805 5991.43,1625.07 r180 bottom
R38 "4.7K" 0805 5900.47,1542.77 r0 bottom
R39 "4.7K" 0805 6065.72,1800.33 r90 bottom
R42 "100" 0805 4794.16,6134.75 r180 bottom
R43 "4.7k" 0805 4794.16,6219.89 r180 bottom
R44 "4.7k" 0805 4734.61,5833.47 r270 bottom
R45 "2.2k" 0805 4599.3,5743.02 r180 bottom
R46 "10" 1206 4383.93,5879.1 r270 bottom
R47 "4.7K" 0805 4929.92,5819.36 r0 bottom
R48 "4.7K" 0805 4929.81,5898.05 r0 bottom
R49 "4.7K" 0805 4927.84,6138.27 r0 bottom
R50 "100" 0805 1278.02,2116.6 r270 bottom
R51 "100" 0805 1197.55,2117.46 r270 bottom
R52 "100" 0805 1113.86,2115.46 r270 bottom
R53 "4.7K" 0805 1197.33,2252.37 r90 bottom
R54 "4.7K" 0805 1113.64,2251.31 r90 bottom
R59 "100" 0805 1748.25,2267.04 r270 bottom
RFC1 "47uH" 0805 5553.57,4183.53 r0 bottom
RFC2 "47uH" 0805 8614.06,6521.66 r270 bottom
RFC3 "47uH" 0805 7202.31,4357.73 r90 bottom value=100uH
RFC4 "47uH" CD75 6722.34,2199.8 r0 bottom locked
RFC5 "22uH" 0805 4616.9,6437.46 r180 bottom
RFC6 "22uH" 0805 4271.43,6062.55 r90 bottom
RFC7 "47uH" 0805 1538.64,2126.31 r180 bottom
S0 "SSB(LSB/USB)" BUTTON_SMD2 1693.31,2560 r0 top locked
S1 "1(160m)" BUTTON_SMD2 2413.98,2560 r0 top locked
S2 "2(80m)" BUTTON_SMD2 3134.45,2560 r0 top locked
S3 "3(60m)" BUTTON_SMD2 3854.92,2560 r0 top locked
S4 "M(40m)" BUTTON_SMD2 4575.39,2560 r0 top locked
S5 "DSP" BUTTON_SMD2 5295.87,2560 r0 top locked
S6 "CW(KEYER)" BUTTON_SMD2 1693.31,2158.66 r0 top locked
S7 "4(30m)" BUTTON_SMD2 2413.98,2158.66 r0 top locked
S8 "5(20m)" BUTTON_SMD2 3134.45,2158.66 r0 top locked
S9 "6(17m)" BUTTON_SMD2 3854.92,2158.66 r0 top locked
S10 "S(15m)" BUTTON_SMD2 4575.39,2158.66 r0 top locked
S11 "STEP" BUTTON_SMD2 5295.87,2158.66 r0 top locked
S12 "AM(FM/DIGI)" BUTTON_SMD2 1693.31,1756.69 r0 top locked
S13 "7(12m)" BUTTON_SMD2 2413.98,1756.69 r0 top locked
S14 "8(10m)" BUTTON_SMD2 3134.45,1756.69 r0 top locked
S15 "9(6m)" BUTTON_SMD2 3854.92,1756.69 r0 top locked
S16 "ENTER" BUTTON_SMD2 4575.39,1555.12 r0 top locked
S17 "FILTER" BUTTON_SMD2 5295.87,1756.69 r0 top locked
S18 "FIX(CENTER)" BUTTON_SMD2 1693.31,1355.71 r0 top locked
S19 ".(4m)" BUTTON_SMD2 2413.98,1355.71 r0 top locked
S20 "0(LF)" BUTTON_SMD2 3134.45,1355.71 r0 top locked
S21 "C(MF)" BUTTON_SMD2 3854.92,1355.71 r0 top locked
S22 "REC" BUTTON_SMD3 1065.94,4189.96 r180 bottom locked
S23 "SPLIT" BUTTON_SMD2 5295.87,1355.71 r0 top locked
S24 "BT PAIR" BUTTON_SMD3 1065.94,5473.43 r180 bottom locked
SW1 "FAN(manual/auto)" SW3 1199.57,6311.02 r180 bottom locked
TS1 "TLZWLA" TLZWLA 8741.14,3653.54 r0 bottom locked
U1 "CS4245" QUAD48 5182.26,3935.59 r180 bottom locked
U2 "LM4853MM" SLAB-MSOP-10_N#1 3362.2,3261.81 r180 top
U3 "KCX_BT" KCX_BT 6236.85,2053.07 r270 top locked
U4 "AP22811A" SOT25-5 8571.88,4057.57 r0 bottom
U5 "STM32H747BIT6" LQFP208-28X28X1.4 7887.76,4898.21 r90 bottom locked
U6 "LM2596S" TO-263-5 6628.94,1466.52 r90 bottom locked
U7 "RT9293B" SOT25-6 4562.99,6188.12 r270 bottom
U8 "MT48LC4M32B2P-6A" MICT-TG-86_N 6573.08,2896.07 r270 bottom
U9 "AP22811A" SOT25-5 5092.52,1721.46 r270 bottom
U10 "PE22(900M22S)" PE22(900M22S) 4101.38,1770.67 r180 bottom locked
U11 "Si5351A-A-GT" SLAB-MSOP-10_N#2 1313.41,2331.92 r90 bottom
U12 "74AC74DR" SO-14 1188.72,2960.46 r270 bottom
U13 "FOX924B-25.000" 2SMX-3SMXB 1305.86,1619.86 r270 bottom
U14 "NCP51460" SOT-23 1307.82,1846.2 r0 bottom
Y1 "ABS25-32.768KHZ-6-1-T" DSO-N4 7868.08,4542.78 r270 bottom locked

## Footprints (in the part's own frame and the unit in brackets; to place one, negate y for a bottom-side part, rotate by r counter-clockwise, add the part's x,y. Pads: shape width x height; smd on the part's side, far side on the other; paste and mask are expansions set on the pad)
2SMX-3SMXB [mm] "Quartz Crystal, SM; Body 6.0 x 3.5 mm (LxW)"
  rect 2.2x1.4 smd: 1(-2.4,-1.25) 2(2.4,-1.25) 3(2.4,1.25) 4(-2.4,1.25)
  silkscreen extent -3,-2.66 3,1.75
0805 [mil]
  rect 55x45 smd: 1(0.86,0.22) 2(90.86,0.22)
  silkscreen extent -37,-31 128,31
0805P [mil]
  rect 55x45 smd: 1(0.86,0.22) 2(90.86,0.22)
  silkscreen extent -37,-31 136,31
1206 [mil]
  rect 60x60 smd: 1(0.86,0.22) 2(135.86,0.22)
  silkscreen extent -49,-50 186,50
1206_Elec_Cap [mil]
  rect 60x60 smd: 1(0.86,0.22) 2(135.86,0.22)
  silkscreen extent -70,-70 186,50
1373866 [mm]
  rect 0.8x1.1 smd: A1(-5.715,2.75) A2(-4.445,2.75) A3(-3.175,2.75) A4(-1.905,2.75) A5(-0.635,2.75) A6(0.635,2.75) A7(1.905,2.75) A8(3.175,2.75) A9(4.445,2.75) A10(5.715,2.75) A11(-5.715,-2.75) A12(-4.445,-2.75) A13(-3.175,-2.75) A14(-1.905,-2.75) A15(-0.635,-2.75) A16(0.635,-2.75) A17(1.905,-2.75) A18(3.175,-2.75) A19(4.445,-2.75) A20(5.715,-2.75)
  round 0.8 hole 1.6 unplated: MH1(-7.925,0) MH2(7.925,0)
  rect 1.2x2.75 smd: MP1(-8.225,2.425) MP2(8.225,2.425) MP3(-8.225,-2.425) MP4(8.225,-2.425)
  silkscreen extent -7.2,-2.1 7.2,4.1
BUTTON_SMD2 [mm]
  rect 2x2 smd: 1(1,5) 2(1,1) 3(9,5) 4(9,1)
  silkscreen extent -0.25,-0.25 10.26,6.27
BUTTON_SMD3 [mm]
  rect 0.7x2 smd: 1(0.5,3) 2(-0.5,3) 3(0.5,-2.921) 4(-0.5,-2.921)
  round 0 hole 0.65 unplated mask+0.05: NPTH1(-1,0) NPTH1(1,0)
  silkscreen extent -2.25,-4.34 1.5,4.32
CAP_ALUM_Pro [mm]
  rect 3x1 smd: 1(-3,0) 2(3,0)
  silkscreen extent -4.32,-3.3 3.33,3.3
CD75 [mil] "AliExpress Power inductor"
  rect 100x250 smd: 1(-102.5,-0.44) 2(104.53,2.03)
  silkscreen extent -150,-150 150,150
DO214 [mm]
  rect 1.96x3.39 smd: 1(0.012,0.006) 2(6.25,0)
  silkscreen extent -1.5,-2.25 7.85,2.25
DSO-N4 [mm] "Crystal, SM; 4 Leads; Body 8 x 3.8 x 2.5 mm (LxWxH)"
  rect 1.3x1.9 smd: 1(-2.75,-1.6) 2(2.75,-1.6) 3(2.75,1.6) 4(-2.75,1.6)
  silkscreen extent -4,-1.9 4.87,1.9
KCX_BT [mil]
  rect 32x78.74 smd: 1(-250.08,1.34) 2(-200.08,1.34) 3(-150.08,1.34) 4(-100.08,1.34) 5(-50.08,1.34) 6(-0.08,1.34) 7(49.92,1.34) 8(99.92,1.34) 9(149.92,1.34) 10(199.92,1.34) 11(249.92,1.34)
  Top Layer keep-out lines w5: 325,699.83 325,939.71 -324.98,939.97 -325,700.09 325,699.83
  Bottom Layer keep-out lines w5: 325,699.83 325,939.71 -324.98,939.96 -325,700.09 325,699.83
  Keep-Out Layer region: -525,975
  silkscreen extent -300,-50 300,925
LORA_ANT_PAD [mm]
  oval 5x4 smd: 1(0.022,0.006)
  Keep-Out Layer lines w0.254: 2.5,2.5 -2.5,2.5 -2.75,2.75 -2.75,18.5 -2.5,18.75 2.5,18.75 2.75,18.5 2.75,2.75 2.5,2.5
  silkscreen extent -3,-2.25 3,19
LQFP208-28X28X1.4 [mm]
  rect 1.2x0.3 smd: 1(0,0)
  oval 1.2x0.3 smd: 2(0,-0.5) 3(0,-1) 4(0,-1.5) 5(0,-2) 6(0,-2.5) 7(0,-3) 8(0,-3.5) 9(0,-4) 10(0,-4.5) 11(0,-5) 12(0,-5.5) 13(0,-6) 14(0,-6.5) 15(0,-7) 16(0,-7.5) 17(0,-8) 18(0,-8.5) 19(0,-9) 20(0,-9.5) 21(0,-10) 22(0,-10.5) 23(0,-11) 24(0,-11.5) 25(0,-12) 26(0,-12.5) 27(0,-13) 28(0,-13.5) 29(0,-14) 30(0,-14.5) 31(0,-15) 32(0,-15.5) 33(0,-16) 34(0,-16.5) 35(0,-17) 36(0,-17.5) 37(0,-18) 38(0,-18.5) 39(0,-19) 40(0,-19.5) 41(0,-20) 42(0,-20.5) 43(0,-21) 44(0,-21.5) 45(0,-22) 46(0,-22.5) 47(0,-23) 48(0,-23.5) 49(0,-24) 50(0,-24.5) 51(0,-25) 52(0,-25.5) 105(29.5,-25.5) 106(29.5,-25) 107(29.5,-24.5) 108(29.5,-24) 109(29.5,-23.5) 110(29.5,-23) 111(29.5,-22.5) 112(29.5,-22) 113(29.5,-21.5) 114(29.5,-21) 115(29.5,-20.5) 116(29.5,-20) 117(29.5,-19.5) 118(29.5,-19) 119(29.5,-18.5) 120(29.5,-18) 121(29.5,-17.5) 122(29.5,-17) 123(29.5,-16.5) 124(29.5,-16) 125(29.5,-15.5) 126(29.5,-15) 127(29.5,-14.5) 128(29.5,-14) 129(29.5,-13.5) 130(29.5,-13) 131(29.5,-12.5) 132(29.5,-12) 133(29.5,-11.5) 134(29.5,-11) 135(29.5,-10.5) 136(29.5,-10) 137(29.5,-9.5) 138(29.5,-9) 139(29.5,-8.5) 140(29.5,-8) 141(29.5,-7.5) 142(29.5,-7) 143(29.5,-6.5) 144(29.5,-6) 145(29.5,-5.5) 146(29.5,-5) 147(29.5,-4.5) 148(29.5,-4) 149(29.5,-3.5) 150(29.5,-3) 151(29.5,-2.5) 152(29.5,-2) 153(29.5,-1.5) 154(29.5,-1) 155(29.5,-0.5) 156(29.5,0)
  oval 0.3x1.2 smd: 53(2,-27.5) 54(2.5,-27.5) 55(3,-27.5) 56(3.5,-27.5) 57(4,-27.5) 58(4.5,-27.5) 59(5,-27.5) 60(5.5,-27.5) 61(6,-27.5) 62(6.5,-27.5) 63(7,-27.5) 64(7.5,-27.5) 65(8,-27.5) 66(8.5,-27.5) 67(9,-27.5) 68(9.5,-27.5) 69(10,-27.5) 70(10.5,-27.5) 71(11,-27.5) 72(11.5,-27.5) 73(12,-27.5) 74(12.5,-27.5) 75(13,-27.5) 76(13.5,-27.5) 77(14,-27.5) 78(14.5,-27.5) 79(15,-27.5) 80(15.5,-27.5) 81(16,-27.5) 82(16.5,-27.5) 83(17,-27.5) 84(17.5,-27.5) 85(18,-27.5) 86(18.5,-27.5) 87(19,-27.5) 88(19.5,-27.5) 89(20,-27.5) 90(20.5,-27.5) 91(21,-27.5) 92(21.5,-27.5) 93(22,-27.5) 94(22.5,-27.5) 95(23,-27.5) 96(23.5,-27.5) 97(24,-27.5) 98(24.5,-27.5) 99(25,-27.5) 100(25.5,-27.5) 101(26,-27.5) 102(26.5,-27.5) 103(27,-27.5) 104(27.5,-27.5) 157(27.5,2) 158(27,2) 159(26.5,2) 160(26,2) 161(25.5,2) 162(25,2) 163(24.5,2) 164(24,2) 165(23.5,2) 166(23,2) 167(22.5,2) 168(22,2) 169(21.5,2) 170(21,2) 171(20.5,2) 172(20,2) 173(19.5,2) 174(19,2) 175(18.5,2) 176(18,2) 177(17.5,2) 178(17,2) 179(16.5,2) 180(16,2) 181(15.5,2) 182(15,2) 183(14.5,2) 184(14,2) 185(13.5,2) 186(13,2) 187(12.5,2) 188(12,2) 189(11.5,2) 190(11,2) 191(10.5,2) 192(10,2) 193(9.5,2) 194(9,2) 195(8.5,2) 196(8,2) 197(7.5,2) 198(7,2) 199(6.5,2) 200(6,2) 201(5.5,2) 202(5,2) 203(4.5,2) 204(4,2) 205(3.5,2) 206(3,2) 207(2.5,2) 208(2,2)
  silkscreen extent -0.4,-27.5 29.5,2.1
MHDR1X2_m [mm] "Connector; Header; 2 Position"
  rect 1x1 hole 0.6: 1(0,0)
  round 1 hole 0.6: 2(1.27,0)
  silkscreen extent -1.39,-1.37 2.67,1.37
MHDR1X3 [mm] "Connector; Header; 3 Position"
  rect 1x1 hole 0.6: 1(0,0)
  round 1 hole 0.6: 2(1.27,0) 3(2.54,0)
  silkscreen extent -1.5,-1.25 4,1.25
MICT-TG-86_N [mm] "SOP, 86-Leads, Body 22.22x10.16mm, Pitch 0.5mm, IPC Medium Density"
  oval 1.6x0.3 smd: 1(-5.5,10.5) 2(-5.5,10) 3(-5.5,9.5) 4(-5.5,9) 5(-5.5,8.5) 6(-5.5,8) 7(-5.5,7.5) 8(-5.5,7) 9(-5.5,6.5) 10(-5.5,6) 11(-5.5,5.5) 12(-5.5,5) 13(-5.5,4.5) 14(-5.5,4) 15(-5.5,3.5) 16(-5.5,3) 17(-5.5,2.5) 18(-5.5,2) 19(-5.5,1.5) 20(-5.5,1) 21(-5.5,0.5) 22(-5.5,0) 23(-5.5,-0.5) 24(-5.5,-1) 25(-5.5,-1.5) 26(-5.5,-2) 27(-5.5,-2.5) 28(-5.5,-3) 29(-5.5,-3.5) 30(-5.5,-4) 31(-5.5,-4.5) 32(-5.5,-5) 33(-5.5,-5.5) 34(-5.5,-6) 35(-5.5,-6.5) 36(-5.5,-7) 37(-5.5,-7.5) 38(-5.5,-8) 39(-5.5,-8.5) 40(-5.5,-9) 41(-5.5,-9.5) 42(-5.5,-10) 43(-5.5,-10.5) 44(5.5,-10.5) 45(5.5,-10) 46(5.5,-9.5) 47(5.5,-9) 48(5.5,-8.5) 49(5.5,-8) 50(5.5,-7.5) 51(5.5,-7) 52(5.5,-6.5) 53(5.5,-6) 54(5.5,-5.5) 55(5.5,-5) 56(5.5,-4.5) 57(5.5,-4) 58(5.5,-3.5) 59(5.5,-3) 60(5.5,-2.5) 61(5.5,-2) 62(5.5,-1.5) 63(5.5,-1) 64(5.5,-0.5) 65(5.5,0) 66(5.5,0.5) 67(5.5,1) 68(5.5,1.5) 69(5.5,2) 70(5.5,2.5) 71(5.5,3) 72(5.5,3.5) 73(5.5,4) 74(5.5,4.5) 75(5.5,5) 76(5.5,5.5) 77(5.5,6) 78(5.5,6.5) 79(5.5,7) 80(5.5,7.5) 81(5.5,8) 82(5.5,8.5) 83(5.5,9) 84(5.5,9.5) 85(5.5,10) 86(5.5,10.5)
  silkscreen extent -5.62,-11.18 4.32,11.32
MOLX-52746-2071 [mm] "FPC Connector, 20-Leads, Right Angle, Pitch 0.5 mm, Mated Height 2.0 mm, SMT"
  rect 0.3x1 smd: 1(-4.75,0.924) 2(-4.25,0.924) 3(-3.75,0.924) 4(-3.25,0.924) 5(-2.75,0.924) 6(-2.25,0.924) 7(-1.75,0.924) 8(-1.25,0.924) 9(-0.75,0.924) 10(-0.25,0.924) 11(0.25,0.924) 12(0.75,0.924) 13(1.25,0.924) 14(1.75,0.924) 15(2.25,0.924) 16(2.75,0.924) 17(3.25,0.924) 18(3.75,0.924) 19(4.25,0.924) 20(4.75,0.924)
  rect 1x1 smd: MP1(-7.134,-0.824) MP2(7.134,-0.824)
  Top Layer region: -8.4,0.424 -6,0.424 -6,-2.626 -6,-2.626 -7.3,-2.626 -7.3,-1.777 -7.3,-1.776 -8.4,-1.776
  Top Layer region: 6,0.424 8.4,0.424 8.4,-1.776 8.4,-1.777 7.3,-1.777 7.3,-2.626 6,-2.626 6,0.424
  silkscreen extent -8.05,-5.68 8.05,1.99
MOLX-501461-0891 [mm] "FPC Connector, 8-Leads, Right Angle, Pitch 0.5 mm, Mated Height 0.8 mm, SMT"
  rect 0.3x1.41 smd: 1(-1.75,0.778) 2(-1.25,0.778) 3(-0.75,0.778) 4(-0.25,0.778) 5(0.25,0.778) 6(0.75,0.778) 7(1.25,0.778) 8(1.75,0.778)
  rect 3.5x2 smd: MP1(-4.2,-0.699) MP2(4.2,-0.684)
  silkscreen extent -5.08,-3.56 5.08,1.4
PE22(900M22S) [mm] "20mm*14mm*2.8mm-S"
  rect 0.8x1.8 smd: 1(0,0) 2(-1.27,0) 3(-2.54,0) 4(-8.11,0) 5(-9.38,0) 6(-10.65,0) 7(-11.92,0) 8(-13.19,0) 9(-14.46,0) 10(-15.73,0) 11(-17,0) 12(-17,-14) 13(-15.73,-14) 14(-14.46,-14) 15(-13.19,-14) 16(-11.92,-14) 17(-10.65,-14) 18(-9.38,-14) 19(-8.11,-14) 20(-2.54,-14) 21(-1.27,-14) 22(0,-14)
  silkscreen extent -19,-14 1,0
PJS008-2003-1 [mm]
  rect 1.6x0.8 smd paste+0 mask+0.05: 1(-15.6,-2.525) 2(-15.6,-1.425) 3(-15.6,-0.325) 4(-15.6,0.775) 5(-15.6,1.875) 6(-15.6,2.975) 7(-15.6,4.075) 8(-15.6,5.175) 9(-15.6,6.325)
  rect 1.4x1.95 smd paste+0 mask+0.05: 10(-5.4,7.225)
  rect 3.5x1.5 smd paste+0 mask+0.05: 11(-2.45,7.45)
  rect 3.5x1.4 smd paste+0 mask+0.05: 12(-2.45,-7.5)
  rect 3.5x1.6 smd paste+0 mask+0.05: 13(-13.45,-7.4)
  rect 3.1x1.2 smd paste+0 mask+0.05: 14(-13.95,7.6)
  round 0 hole 0.65 unplated mask+0.05: NPTH1(-9.8,-4)
  round 0 hole 0.7 unplated mask+0.05: NPTH2(-9.8,3.55)
  silkscreen extent -15.32,-7.25 -0.28,7.25, body extent -15.04,-7.18 -0.84,7.42, height 2
QUAD48 [mm]
  rect 1.5x0.3 smd: 1(0.01,-0.002)
  oval 1.5x0.3 smd: 2(0.01,-0.502) 3(0.01,-1.002) 4(0.01,-1.502) 5(0.01,-2.002) 6(0.01,-2.502) 7(0.01,-3.002) 8(0.01,-3.502) 9(0.01,-4.002) 10(0.01,-4.502) 11(0.01,-5.002) 12(0.01,-5.502) 25(9.21,-5.502) 26(9.21,-5.002) 27(9.21,-4.502) 28(9.21,-4.002) 29(9.21,-3.502) 30(9.21,-3.002) 31(9.21,-2.502) 32(9.21,-2.002) 33(9.21,-1.502) 34(9.21,-1.002) 35(9.21,-0.502) 36(9.21,-0.002)
  oval 0.3x1.5 smd: 13(1.86,-7.352) 14(2.36,-7.352) 15(2.86,-7.352) 16(3.36,-7.352) 17(3.86,-7.352) 18(4.36,-7.352) 19(4.86,-7.352) 20(5.36,-7.352) 21(5.86,-7.352) 22(6.36,-7.352) 23(6.86,-7.352) 24(7.36,-7.352) 37(7.36,1.848) 38(6.86,1.848) 39(6.36,1.848) 40(5.86,1.848) 41(5.36,1.848) 42(4.86,1.848) 43(4.36,1.848) 44(3.86,1.848) 45(3.36,1.848) 46(2.86,1.848) 47(2.36,1.848) 48(1.86,1.848)
  silkscreen extent 0.01,-7.34 9.2,1.85
SB_0603 [mil] "Jumper"
  rect 32x40 smd: 1(33.75,0) 2(-33.75,0)
  Top Layer region: 23.75,20 13.75,20 -6.25,0 13.75,-20 23.75,-20
  Top Layer region: -26.25,0 -16.25,0 3.75,20 -26.25,20
  Top Layer region: -26.25,0 -16.25,0 3.75,-20 -26.25,-20
  Top Layer lines w6: -33.75,0 33.75,0
SB_0603_NO [mil] "Jumper"
  rect 32x40 smd: 1(33.75,0) 2(-33.75,0)
  Top Layer region: -26.25,0 -16.25,0 3.75,-20 -26.25,-20
  Top Layer region: -26.25,0 -16.25,0 3.75,20 -26.25,20
  Top Layer region: 23.75,20 13.75,20 -6.25,0 13.75,-20 23.75,-20
SLAB-MSOP-10_N#1 [mm] "SOP, 10-Leads, Body 3x3mm, Pitch 0.5mm, IPC Medium Density"
  oval 1.65x0.25 smd far side: 1(-2.025,-1) 2(-2.025,-0.5) 3(-2.025,0) 4(-2.025,0.5) 5(-2.025,1) 6(2.025,1) 7(2.025,0.5) 8(2.025,0) 9(2.025,-0.5) 10(2.025,-1)
SLAB-MSOP-10_N#2 [mm] "SOP, 10-Leads, Body 3x3mm, Pitch 0.5mm, IPC Medium Density"
  oval 1.65x0.25 smd: 1(-2.025,1) 2(-2.025,0.5) 3(-2.025,0) 4(-2.025,-0.5) 5(-2.025,-1) 6(2.025,-1) 8(2.025,0) 9(2.025,0.5) 10(2.025,1)
  oval 1.85x0.25 smd: 7(1.925,-0.5)
  silkscreen extent -2.15,-1.5 0.8,1.85
SO-14 [mil]
  oval 80x24 smd: 1(0,0) 2(0,-50) 3(0,-100) 4(0,-150) 5(0,-200) 6(0,-250) 7(0,-300) 8(220,-300) 9(220,-250) 10(220,-200) 11(220,-150) 12(220,-100) 13(220,-50) 14(220,0)
  silkscreen extent 59,-335 161,38
SOD87 [mil]
  rect 50x70 smd: 1(0.46,0.23) 2(145.46,0.23)
  silkscreen extent -45,-55 201,55
SOT25-5 [mm] "5 lead package"
  rect 1.05x0.6 smd: 1(-1.35,0.95) 2(-1.35,0) 3(-1.35,-0.95) 4(1.35,-0.95) 5(1.35,0.95)
  silkscreen extent -1.75,-1.75 1.25,1.87
SOT25-6 [mm] "6 lead package"
  rect 1.05x0.6 smd: 1(-1.35,0.95) 2(-1.35,0) 3(-1.35,-0.95) 4(1.35,-0.95) 5(1.35,0) 6(1.35,0.95)
  silkscreen extent -1.75,-1.75 1.25,1.87
SOT-23 [mm]
  rect 0.8x0.9 smd: 1(-0.98,-1) 2(0.98,-1) 3(0,1)
  silkscreen extent -1.95,-1.62 1.5,0.7, body extent -1.52,-0.7 1.52,0.7, height 1.11
SOT-23-Pro [mil]
  rect 36x36 smd: 1(0.39,0.34) 2(75.39,0.34)
  rect 36x50 smd: 3(38.39,80.34)
  silkscreen extent -75,-40 150,125
SW3 [mm] "Three poe switch"
  rect 4x1.2 smd: 1(-1.116,3) 2(-1.116,0) 3(-1.116,-3)
  Keep-Out Layer board cut-out: 5.08,4.445 1.25,4.445 1.25,-4.445 5.08,-4.445
  Keep-Out Layer lines w0.127: 5.08,-4.445 1.27,-4.445 1.27,4.445 5.08,4.445
  silkscreen extent -3.75,-4.7 4.7,4.7
TLZWLA [mm]
  rect 1.4x1.95 smd paste+0 mask+0.05: a(0,5.08) b(-4.445,2.54) c(-4.445,0) d(-4.445,-2.54) e(0,-5.08)
  round 0 hole 1.3 unplated mask+0.05: NPTH1(-1.27,-2.54) NPTH2(-1.27,2.54)
  silkscreen extent -5.71,-6.35 3.26,6.35
TO-263-5 [mil]
  rect 118.11x42 smd: 1(251,-133.46) 2(251,-66.46) 3(251,0) 4(251,67.54) 5(251,134.54)
  rect 354.33x401.57 smd: 3(-137.8,0)
  silkscreen extent -335,-217 315,217
USB_OUT_A [mil]
  round 55 hole 30: 1(480.7,120.96) 2(480.7,220.96) 3(480.7,300.96) 4(480.7,400.96)
  round 130 hole 85: 5(410.7,520.96) 6(410.7,0.96)
  silkscreen extent 1,1 561,521
USBC_24P [mm]
  rect 0.3x0.85 smd: A1(-2.75,0.5) A2(-2.25,0.5) A3(-1.75,0.5) A4(-1.25,0.5) A5(-0.75,0.5) A6(-0.25,0.5) A7(0.25,0.5) A8(0.75,0.5) A9(1.25,0.5) A10(1.75,0.5) A11(2.25,0.5) A12(2.75,0.5)
  round 0.5 hole 0.35: B1(2.8,-0.733) B2(2.4,-1.355) B3(1.6,-1.355) B4(1.2,-0.733) B5(0.8,-1.355) B6(0.4,-0.733) B7(-0.4,-0.733) B8(-0.8,-1.355) B9(-1.2,-0.733) B10(-1.6,-1.355) B11(-2.4,-1.355) B12(-2.8,-0.733)
  round 0.3 hole 0.65 unplated: MH1(-3.669,-0.001) MH2(3.679,0.001)
  oval 0.838x1.2 hole 0.7: MH3(-4.13,-1.25) MH4(4.13,-1.25) MH5(4.49,-5.64) MH6(-4.49,-5.64)
  silkscreen extent -5.15,-6.54 5.13,1.91
YuanQi4mm [mm] "Board To Board 1.27mm pitch 20pin 4mm stack"
  rect 0.74x2 smd: A1(-5.715,1.905) A2(-4.445,1.905) A3(-3.175,1.905) A4(-1.905,1.905) A5(-0.635,1.905) A6(0.635,1.905) A7(1.905,1.905) A8(3.175,1.905) A9(4.445,1.905) A10(5.715,1.905) A11(-5.715,-1.905) A12(-4.445,-1.905) A13(-3.175,-1.905) A14(-1.905,-1.905) A15(-0.635,-1.905) A16(0.635,-1.905) A17(1.905,-1.905) A18(3.175,-1.905) A19(4.445,-1.905) A20(5.715,-1.905)
  silkscreen extent -7.62,-3.18 7.62,3.18